# Altium PCB ESP8266TV.PcbDoc
Units mil, origin at the board's own origin, x right, y up, seen from the top; angles counter-clockwise.
Board outline 1875 x 1755 mil, 2 copper layers (Top Layer, Bottom Layer); 48 components, 33 nets, 188 pads, 40 vias.
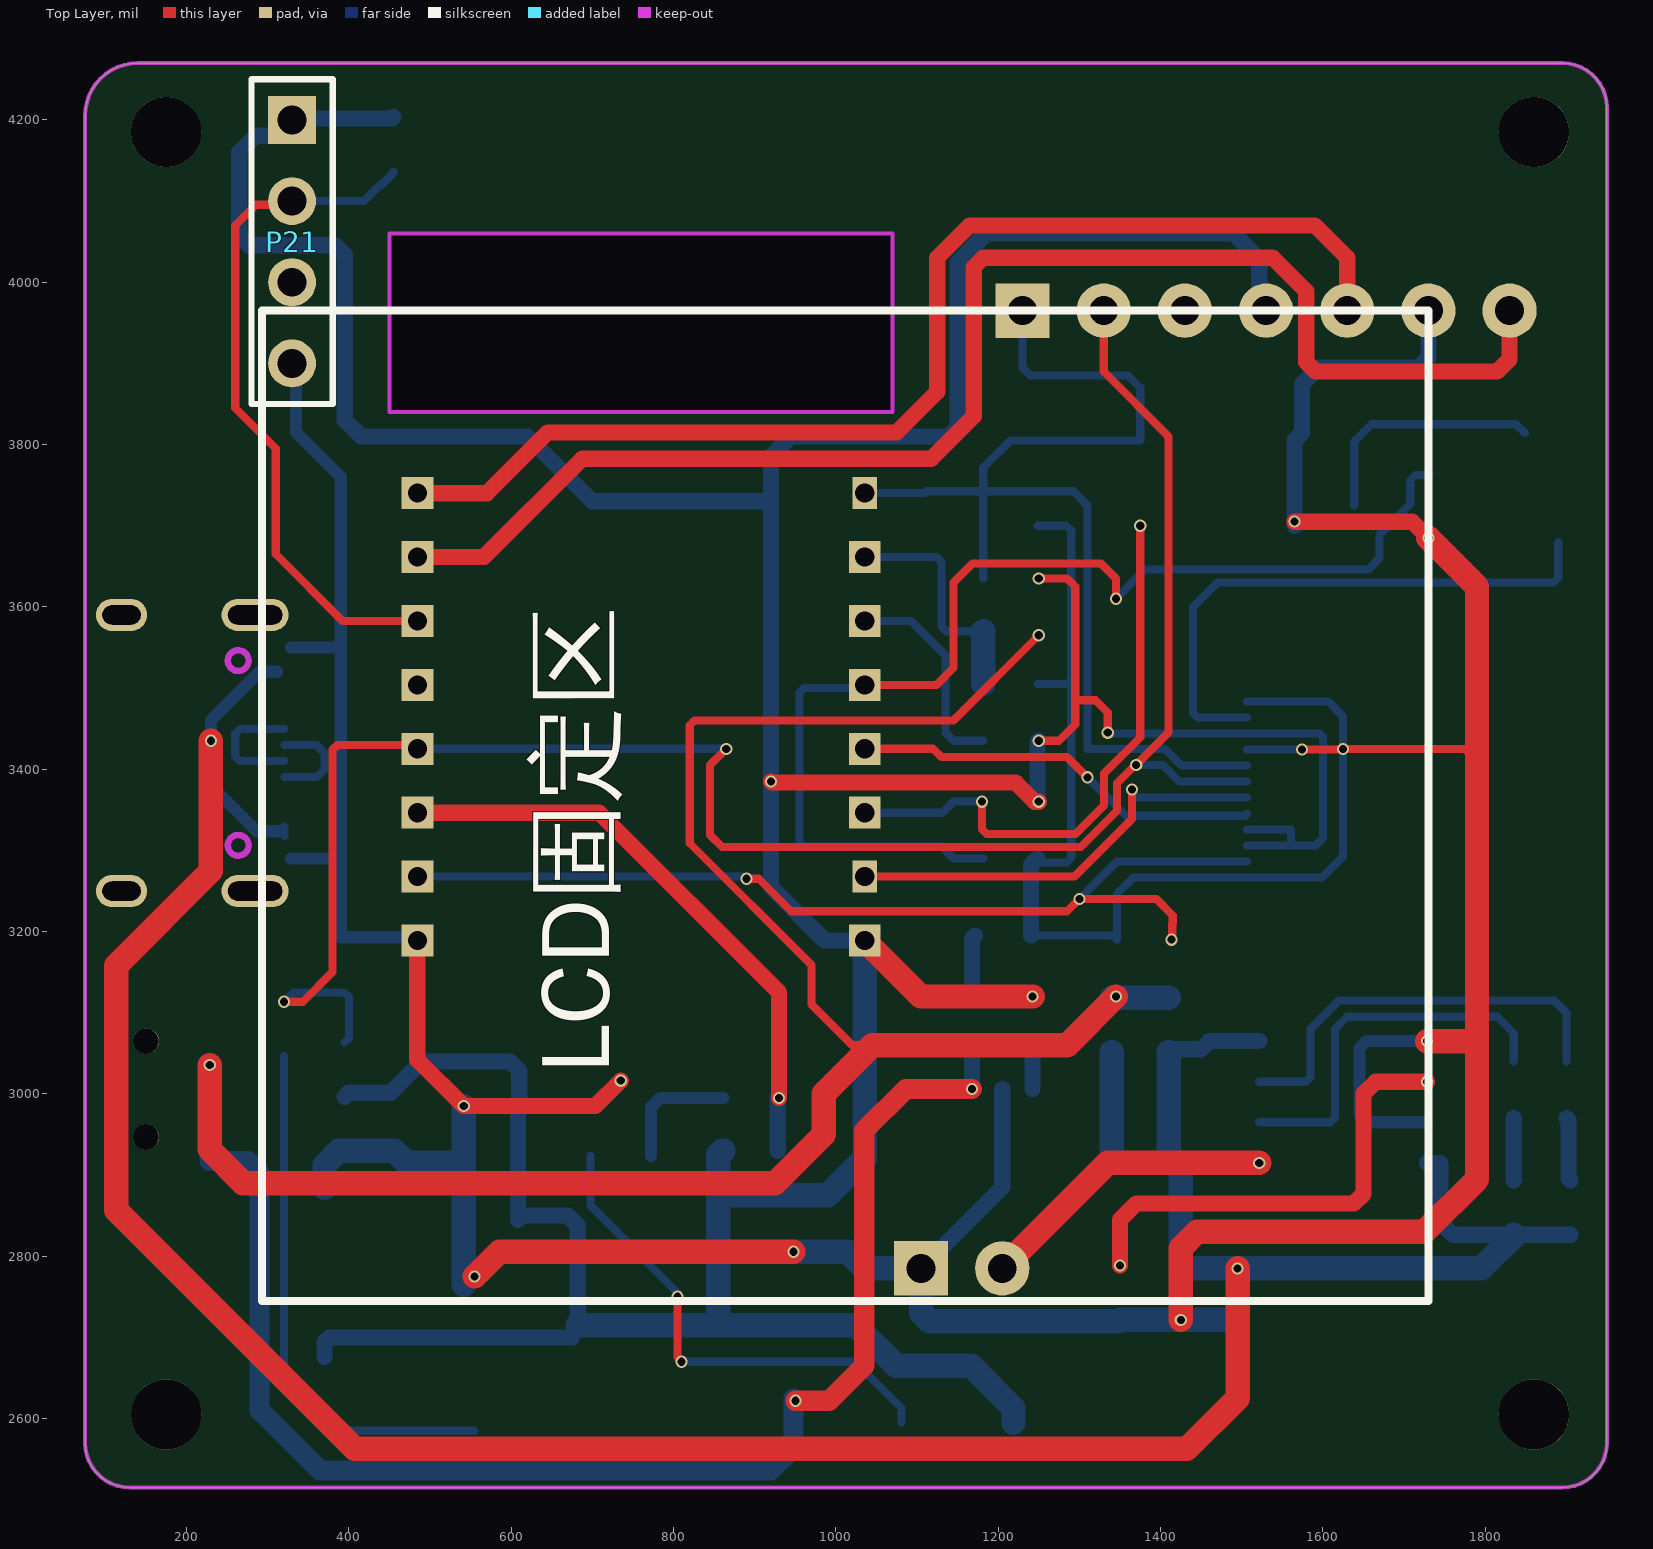
[diagram p0: Top Layer view]
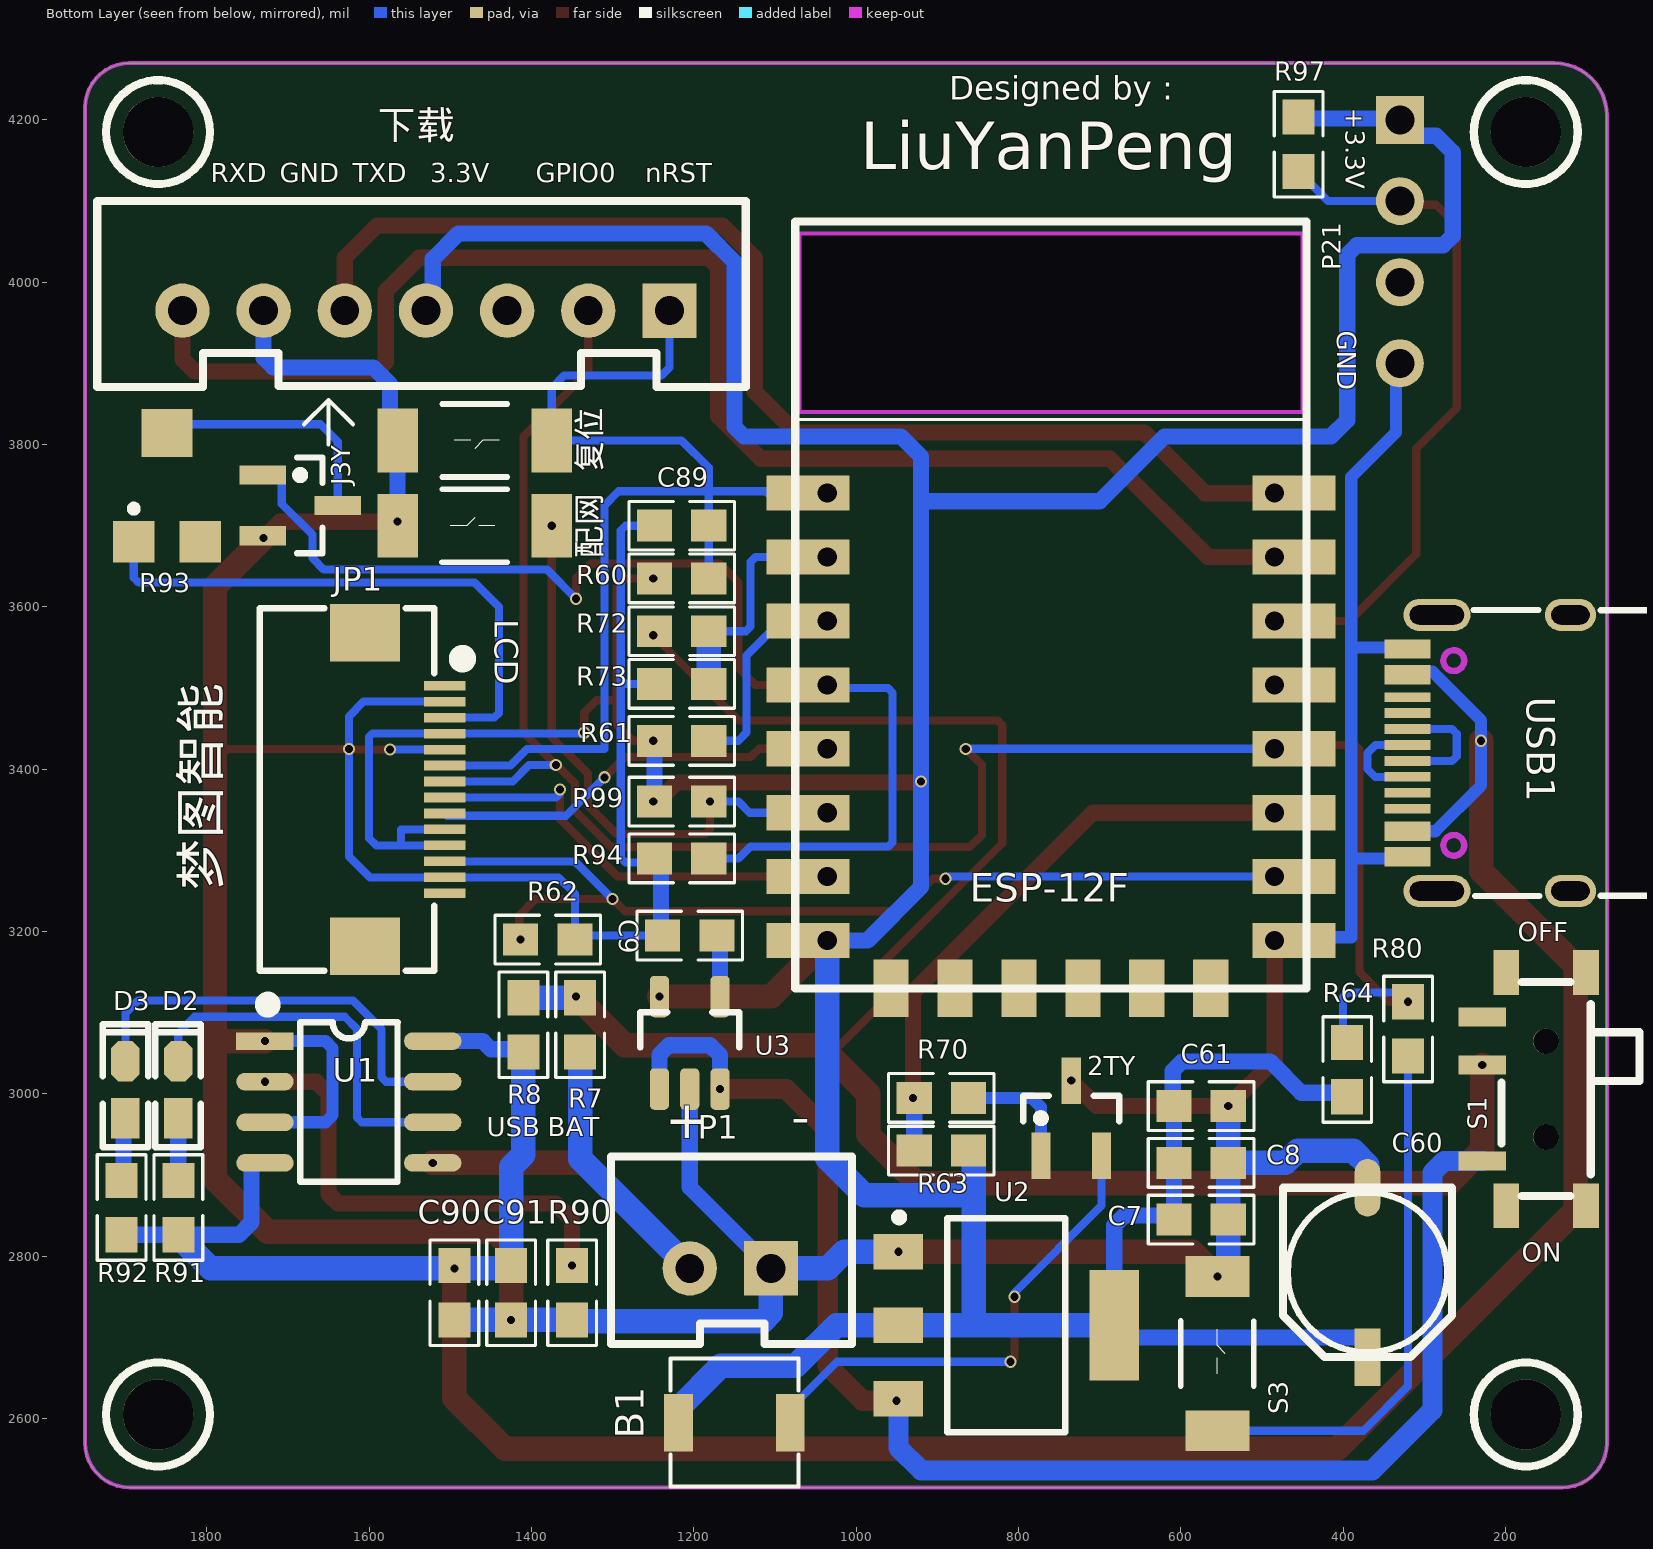
[diagram p1: Bottom Layer view, seen from below]

## Layer stack, top to bottom
Top Solder: solder mask 0.4, Solder Resist, Dk 3.5
Top Layer: signal copper 1.4
Dielectric 1: dielectric 12.6, FR-4, Dk 4.8
Bottom Layer: signal copper 1.4
Bottom Solder: solder mask 0.4, Solder Resist, Dk 3.5

## Board outline
130,2515 cw(c130,2570) 75,2570 75,4205 cw(c140,4205) 140,4270 1895,4270 cw(c1895,4215) 1950,4215 1950,2570 cw(c1895,2570) 1895,2515
cut-out: 450,3840 1070,3840 1070,4060 450,4060

## Design rules (kind name [scope] priority, off if disabled: settings)
Clearance [All] p1: gap=6 ignorepadtopadclearanceinfootprint=TRUE except(0: Arc-Hole Track-Hole SMDPad-Hole THPad-Hole Via-Hole Fill-Hole Poly-Hole Region-Hole Text-Hole)
HoleSize [All] p1: absolutevalues=TRUE maxlimit=200 minlimit=1 maxpercent=80.000 minpercent=20.000
HoleToHoleClearance [All] p1: gap=1 allowstackedmicrovias=TRUE
MinimumSolderMaskSliver [All] p1: minsoldermaskwidth=1
PolygonConnect [All] p1: connectstyle=Relief reliefconductorwidth=10 reliefentries=4 polygonreliefangle="90 Angle" airgapwidth=10
RoutingVias [All] p1: holewidth=28 width=50 viastyle="Through Hole" minholewidth=10 minwidth=10 maxholewidth=200 maxwidth=200
SilkToSilkClearance [All] p1: silktosilkclearance=0
SilkToSolderMaskClearance [IsPad] p1: minsilkscreentomaskgap=0 clearancetoexposedcopper=TRUE
SolderMaskExpansion [All] p1: expansion=4
Width [All] p1: maxlimit=100 minlimit=5 preferedwidth=10 minimp=50.000000 maximp=50.000000 favimp=50.000000
25 further rules are at their usual default settings.

## Classes and differential pairs
component class 蓝牙模块电路: 2TY C7 C8 C9 C60 C61 C89 C90 C91 D2 D3 D5 ESP-12F flash JP1 LCD P1 P21 R7 R8 R60 R61 R62 R63 R64 R70 R72 R73 R80 R90 R91 R92 R93 R94 R97 R99 S1 S3 U1 U2 U3 USB1

## Components (designator, comment, footprint, x,y, rotation, side; value= is the part's Value field where it differs from the comment)
2TY "PNP" 2TY 735,2970 r90 bottom
B1 "DC3V" FM4020 1150,2595 r180 bottom
C7 "0.1uF" 0603-1 575,2845 r0 bottom value=0.1u
C8 "10uF" 0603-1 575,2915 r0 bottom value=0.1u
C9 "10uF" 0603-1 1205,3195 r180 bottom value=0.1u
C60 "10V" "CM C(5*5.4)" 370,2780 r270 bottom value=100uF
C61 "" 0603-1 575,2985 r0 bottom value=0.1uF
C89 "0.1uF" 0603-1 1215,3700 r0 bottom
C90 "" 0603-1 1495,2755 r90 bottom value=10uF
C91 "" 0603-1 1425,2755 r90 bottom value=0.1uF
D2 "" "LED 0603G" 1835,3005 r90 bottom
D3 "" "LED 0603R" 1900,3005 r90 bottom
E1 "固定孔" "M2.2 - 3" 175,4185 r180 bottom
E2 "固定孔" "M2.2 - 3" 1860,4185 r180 bottom
E3 "固定孔" "M2.2 - 3" 1860,2605 r180 bottom
E4 "固定孔" "M2.2 - 3" 175,2605 r180 bottom
ESP-12F "ESP-12E&F Module" "ESP-12E&F Module" 760,3435 r180 bottom
J3Y "J3Y" J3Y 1685,3725 r180 bottom (schematic designator VT1)
JP1 "FPC1.0-14P" "FPC0.5 2H-S-W-14P" 1605,3375 r270 bottom
P1 "VBAT" XH2.54-2P 1105,2785 r0 bottom
P21 "Header 4" HDR1X4 330,4200 r270 top
R7 "0R" 0603-1 1340,3085 r270 bottom
R8 "0R" 0603-1 1410,3085 r270 bottom
R60 "472" 0603-1 1215,3635 r180 bottom
R61 "472" 0603-1 1215,3435 r180 bottom
R62 "472" 0603-1 1380,3190 r0 bottom
R63 "472" 0603-1 895,2930 r0 bottom
R64 "472" 0603-1 395,3030 r90 bottom
R70 "01B" 0603-1 895,2995 r0 bottom value=1K
R72 "472" 0603-1 1215,3570 r0 bottom
R73 "01B" 0603-1 1215,3505 r180 bottom
R80 "01B" 0603-1 320,3080 r90 bottom
R90 "302" 0603-1 1350,2755 r90 bottom value=3K
R91 "01B" 0603-1 1835,2860 r90 bottom value=1K
R92 "01B" 0603-1 1905,2860 r270 bottom value=1K
R93 "" "R 3*3" 2114,3586 r90 bottom value=1K
R94 "01B" 0603-1 1215,3290 r0 bottom
R97 "102" 0603-1 455,4170 r270 bottom
R99 "472" 0603-1 1215,3360 r0 bottom
S1 "SS-12F23" MSK-12C01-07 150,3005.94 r90 bottom
S3 "SW-PB" "SW2 _M" 555,2590 r180 bottom
U1 "TP4056" SOP8_N 1625,2990 r180 bottom
U2 "ASM1117" SOT-223 815,2715 r270 bottom
U3 "LP2992 3V3" SOT23-5 1205,3065 r90 bottom
USB1 "Type-C" USB_TYPE_C_FEMALE_12_16P 120,3420 r90 bottom
下载 "Header 7" XH2.54-7P 1230,3965 r0 bottom (schematic designator P20)
复位 "SW-PB" "SW2 _M" 1560,3805 r270 bottom (schematic designator SW2)
配网 "SW-PB" "SW2 _M" 1380,3700 r90 bottom (schematic designator SW1)

## Footprints (in the part's own frame and the unit in brackets; to place one, negate y for a bottom-side part, rotate by r counter-clockwise, add the part's x,y. Pads: shape width x height; smd on the part's side, far side on the other; paste and mask are expansions set on the pad)
2TY [mm] "SOT23, 3-Leads, Body 2.9x1.3mm, Pitch 0.95mm, Lead Span 2.3mm - Reverse Pinning, IPC Low Density"
  rect 1.45x0.6 smd: 1(-1.175,0.95) 2(-1.175,-0.95) 3(1.175,0)
  silkscreen extent -0.12,-1.5 0.7,1.5, body extent -0.7,-1.5 0.7,1.5, height 1.1
0603-1 [mm] "贴片带丝印"
  rect 1.1x1 smd: 1(-0.85,0) 2(0.85,0)
  silkscreen extent -1.65,-0.76 1.65,0.76, body extent -1.14,-0.38 1.14,0.38, height 1
"CM C(5*5.4)" [mm] "贴片电解电容，直径5mm，高5.4mm"
  rect 1.8x0.8 smd: 1(2.65,0)
  oval 1.8x0.8 smd: 2(-2.65,0)
  silkscreen extent -2.65,-2.65 2.65,2.65, body extent -2.95,-2.65 2.95,2.65, height 5.4
"ESP-12E&F Module" [mm]
  rect 2.6x1.1 smd: 1(-7.6,7.75) 2(-7.6,5.75) 3(-7.6,3.75) 4(-7.6,1.75) 5(-7.6,-0.25) 6(-7.6,-2.25) 7(-7.6,-4.25) 8(-7.6,-6.25) 15(7.6,-6.25) 16(7.6,-4.25) 17(7.6,-2.25) 18(7.6,-0.25) 19(7.6,1.75) 20(7.6,3.75) 21(7.6,5.75) 22(7.6,7.75)
  rect 0.762x1 hole 0.6: 1(-7,7.75) 7(-7,-4.25)
  rect 0.762x1 / inner rect 0.762x1 / far side rect 1x1 hole 0.6: 2(-7,5.75) 3(-7,3.75) 4(-7,1.75) 5(-7,-0.25) 6(-7,-2.25) 8(-7,-6.25) 15(7,-6.25) 16(7,-4.25) 17(7,-2.25) 18(7,-0.25) 19(7,1.75) 20(7,3.75) 21(7,5.75) 22(7,7.75)
  rect 1.1x1.8 smd: 9(-5,-7.75) 10(-3,-7.75) 11(-1,-7.75) 12(1,-7.75) 13(3,-7.75) 14(5,-7.75)
  silkscreen extent -8,-7.75 8,16.25
FM4020 [mm] "小型蜂鸣器"
  rect 0.9x1.8 smd: 1(-1.75,0) 2(1.75,0)
  silkscreen extent -2,-2 2,2
"FPC0.5 2H-S-W-14P" [mm] "长：11.2mm，宽：5.2mm，高：2mm"
  rect 1.8x2.2 smd: 0(-4.9,0) 0(4.9,0)
  rect 0.3x1.3 smd: 1(-3.25,2.497) 2(-2.75,2.497) 3(-2.25,2.497) 4(-1.75,2.497) 5(-1.25,2.497) 6(-0.75,2.497) 7(-0.25,2.497) 8(0.25,2.497) 9(0.75,2.497) 10(1.25,2.497) 11(1.75,2.497) 12(2.25,2.497) 13(2.75,2.497) 14(3.25,2.497)
  silkscreen extent -5.68,-3.3 5.68,3.23, body extent -5.6,-3.15 5.6,2.85, height 2
HDR1X4 [mm] "Connector; Header; 4 Position"
  rect 1.5x1.5 hole 0.9: 1(0,0)
  round 1.5 hole 0.9: 2(2.54,0) 3(5.08,0) 4(7.62,0)
  silkscreen extent -1.27,-1.27 8.89,1.27
J3Y [mm] "SOT23, 3-Leads, Body 2.9x1.3mm, Pitch 0.95mm, Lead Span 2.3mm - Reverse Pinning, IPC Low Density"
  rect 1.45x0.6 smd: 1(-1.175,0.95) 2(-1.175,-0.95) 3(1.175,0)
  silkscreen extent -0.13,-1.5 0.7,1.5, body extent -0.7,-1.5 0.7,1.5, height 1.1
"LED 0603G" [mil] "绿色0603LED"
  rect 50x35 smd: 1(-35,0.26)
  oct 50x35 smd: 2(35,0.26)
  silkscreen extent -71,-28 81,28, body extent -31,-16 31,16, height 24
"LED 0603R" [mil] "红色0603LED"
  rect 50x35 smd: 1(-35,0.26)
  oct 50x35 smd: 2(35,0.26)
  silkscreen extent -71,-28 81,28, body extent -31,-16 31,16, height 24
"M2.2 - 3" [mm] "固定孔"
  round 2.2 hole 2.2: 1(0,0)
  silkscreen extent -1.63,-1.62 1.63,1.62
MSK-12C01-07 [mm] "6.7*2.8*1.5mm(长宽高）"
  rect 1.4x0.8 smd: 0(-3.65,-1.25) 0(-3.65,1.25) 0(3.65,-1.25) 0(3.65,1.25)
  rect 0.6x1.5 smd: 1(-2.25,1.996) 2(0.75,1.996) 3(2.25,1.996)
  round 0.8 hole 0.8: " "(-1.5,0) " "(1.5,0)
  silkscreen extent -3.35,-2.92 3.35,1.4, body extent -3.92,-2.9 3.92,2.4, height 1.5
"R 3*3" [mil] "3*3可调贴片电阻"
  rect 51.18x51.18 smd: 1(94,-224) 2(94,-306)
  rect 59.06x62.99 smd: 3(228,-265)
  silkscreen extent 131,-228 139,-220
SOP8_N [mm] "5*6*1.8mm（长宽高）"
  rect 1.8x0.55 smd: 1(-2.625,1.905)
  oval 1.8x0.55 smd: 2(-2.625,0.635) 3(-2.625,-0.635) 4(-2.625,-1.905) 5(2.625,-1.905) 6(2.625,-0.635) 7(2.625,0.635) 8(2.625,1.905)
  silkscreen extent -2.69,-2.5 1.52,3.2, body extent -3,-2.5 3,2.5, height 1.9
SOT23-5 [mm] "SOT23, 3-Leads, Body 3.1x3.0mm (max), Pitch 0.95mm, IPC Medium Density"
  rrect50% 1.3x0.6 smd: 1(-1.5,0.95) 2(-1.5,0) 3(-1.5,-0.95) 4(1.396,-0.95) 5(1.396,0.95)
  silkscreen extent -0.2,-1.55 0.9,1.55, body extent -1.48,-1.45 1.32,1.45, height 1.2
SOT-223 [mm]
  rect 1.1x1.55 smd: 1(-2.3,-3.375) 2(0,-3.375) 3(2.3,-3.375)
  rect 3.45x1.55 smd: 4(0,3.375)
  silkscreen extent -3.5,-3.48 3.35,1.85, body extent -3.3,-3.94 3.3,3.43, height 0.8
"SW2 _M" [mil] "3*4*2"
  rect 78.74x50 smd: 1(0,185) 2(0,-5)
  silkscreen extent -45,50 45,130, body extent -45,48 45,133, height 31
USB_TYPE_C_FEMALE_12_16P [mm]
  oval 1x1.6 hole 0.6 slot 1.2 at 90 deg: 0(-4.32,0) 0(4.32,0)
  oval 1x2.1 hole 0.6 slot 1.7 at 90 deg: 0(-4.32,4.18) 0(4.32,4.18)
  rect 0.3x1.45 smd: A1(-3.4,5.1) A4(-2.6,5.1) A5(-1.25,5.1) A6(-0.25,5.1) A7(0.25,5.1) A8(1.25,5.1) A9(2.6,5.1) A12(3.4,5.1) B1(3.1,5.1) B4(2.3,5.1) B5(1.75,5.1) B6(0.75,5.1) B7(-0.75,5.1) B8(-1.75,5.1) B9(-2.3,5.1) B12(-3.1,5.1)
  Keep-Out Layer circle w0.2: c2.89,3.65 r0.325
  Keep-Out Layer circle w0.2: c-2.89,3.65 r0.325
  silkscreen extent -4.47,-2.6 4.47,3.03, body extent -4.47,-2.63 4.43,4.67, height 3.4
XH2.54-2P [mm] "接插件，2P"
  rect 1.7x1.7 hole 0.9: 1(0,0)
  round 1.7 hole 0.9: 2(2.54,0)
  silkscreen extent -2.54,-3.51 5.01,2.37, body extent -2.5,-3.3 5.04,2.4, height 7.05
XH2.54-7P [mm] "接插件，7P"
  rect 1.7x1.7 hole 0.9: 1(0,0)
  round 1.7 hole 0.9: 2(2.54,0) 3(5.08,0) 4(7.62,0) 5(10.16,0) 6(12.7,0) 7(15.24,0)
  silkscreen extent -2.39,-3.43 17.91,2.39, body extent -2.5,-3.3 17.74,2.4, height 7.05

## Part data
2TY: "PNP Bipolar Transistor", LatestRevisionDate=29-May-2009, LatestRevisionNote="IPC-7351 Footprint Added.", PackageDescription="3-Pin SOT-23 Package 0.95 mm Pitch, 2.4 mm Lead Span", PackageReference=SOT-23B, PackageVersion=Aug-1999, Published=8-Jun-2000, Publisher="Altium Limited"
B1: library part BEEP, "蜂鸣器"
C7: library part 电容-0402, "Capacitor"
C8 C9: library part 电容-0603, "Capacitor"
C60: library part "Cap Pol3", "Polarized Capacitor (Surface Mount)", LatestRevisionDate=29-May-2009, LatestRevisionNote="IPC-7351 Footprint Added.", PackageDescription="Chip Capacitor", PackageReference=C0805, Published=8-Jun-2000, Publisher="Altium Limited"
C61 C90 C91: library part Cap, "Capacitor", LatestRevisionDate=17-Jul-2002, LatestRevisionNote="Re-released for DXP Platform.", PackageDescription="Radial Cap, Thru-Hole; 2 Leads; 0.3 in Pin Spacing", PackageReference=RAD-0.3, Published=8-Jun-2000, Publisher="Altium Limited"
C89: library part SMT_C_0402, "Surface mount capacitor 0402"
D2 D3: library part LED0, "Typical INFRARED GaAs LED", LatestRevisionDate=08-Jul-2005, LatestRevisionNote="Mech Layer 1 removed.", PackageDescription="LED; 2 Leads", PackageReference=LED-0, Published=8-Jun-2000, Publisher="Altium Limited"
E1 E2 E3 E4: library part Antenna, "Generic Antenna", LatestRevisionDate=17-Jul-2002, LatestRevisionNote="Re-released for DXP Platform.", PackageReference=PIN1, Published=24-Mar-1999, Publisher="Altium Limited"
J3Y: library part SMT_TRIODE_NPN, "Surface mount NPN transistor, package SOT-23"
JP1: library part FPC-14P, "FPC连接器"
P1: library part "Header 2", "Header, 2-Pin", LatestRevisionDate=17-Jul-2002, LatestRevisionNote="Re-released for DXP Platform.", Publisher="Altium Limited"
P21: "Header, 4-Pin", LatestRevisionDate=17-Jul-2002, LatestRevisionNote="Re-released for DXP Platform.", Publisher="Altium Limited"
R7 R8 R60 R61 R62 R63 R64 R80 R99: library part SMT_R_0402, "Surface mount resistor 0402"
R70 R72 R73 R90 R91 R92 R94 R97: library part Res2, "Resistor", LatestRevisionDate=17-Jul-2002, LatestRevisionNote="Re-released for DXP Platform.", PackageDescription="Axial Device, Thru-Hole; 2 Leads; 0.4 in Pin Spacing", PackageReference=AXIAL-0.4, Published=8-Jun-2000, Publisher="Altium Limited"
R93: library part "Res Tap", "Tapped Resistor", LatestRevisionDate=17-Jul-2002, LatestRevisionNote="Re-released for DXP Platform.", PackageDescription="Variable Resistor, Thru-Hole; 3 Leads", PackageReference=VR3, Published=24-Mar-1999, Publisher="Altium Limited", Set Position=0.5, Sim Note="Enter the Resistance value and the set point into parameter fields."
S1: library part SSW-1P, "1路波动开关"
S3 复位 配网: "微动开关", LatestRevisionDate=17-Jul-2002, LatestRevisionNote="Re-released for DXP Platform.", PackageReference=SPST-2, Published=24-Mar-1999, Publisher="Altium Limited"
U2: "3.3V稳压芯片"
U3: library part LP2992, "LDO"
USB1: library part USB-Type-C-TOP
下载: "Header, 7-Pin", LatestRevisionDate=17-Jul-2002, LatestRevisionNote="Re-released for DXP Platform.", Publisher="Altium Limited"

## Via types
v1: diameter 15, hole 10, Top Layer to Bottom Layer, 40 vias

## Nets (pads, with @x,y where several pads share a name; then routed paths per layer and width w, separated by ;. In a path a pad name is that pad's centre, name@x,y a point inside that pad or via, vN(x,y) a via of type N, cw(c..) or ccw(c..) an arc to the next point about the centre after c; other vN are vias at no path point)
+3.3V: B1.1 C7.2 C8.2 C60.1 C61.2 ESP-12F.8 JP1.4 JP1.10 JP1.11 P21.1 R60.1 R61.1 R63.1 R64.1 R97.1 R99.2 U2.2 U2.4 U3.5 下载.4 | length 6594.8
  Top Layer w10: v1(1250,3435) 1275,3435 1295,3455 1295,3485 ; v1(1250,3635) 1285,3635 1295,3625 1295,3485 ; v1(1335,3445) 1335,3470 1320,3485 1295,3485
  Top Layer w20: v1(920,3385) 921.5,3383.5 1221.5,3383.5 1245,3360 v1(1250,3360)
  Top Layer w30: ESP-12F.8@1035.59,3188.94 1104.58,3119.94 v1(1242.4,3119.94)
  Bottom Layer w10: v1@1335,3443.9 JP1.4 1596.1,3443.9 1600,3440 1600,3315 1591.1,3306.1 1560,3306.1 ; JP1.11 1560,3306.1 ; JP1.10 1560.79,3325.79 1560.79,3306.89 1560,3306.1
  Bottom Layer w20: C60.1 370,2694.25 375.75,2700 U2.4@675,2700 ; R64.1 400,3001.53 451.53,3001.53 490,3040 598.28,3040 610,3028.28 610,2986.54 C61.2 C8.2 C7.2 613.46,2850 670,2850 682.13,2837.87 U2.4 ; R97.1 453.27,4201.73 331.73,4201.73 P21.1 310.47,4180.47 285.47,4180.47 265,4160 265,4057.24 276.72,4045.53 383.28,4045.53 395,4033.81 395,3830 415,3810 620,3810 700,3730 920,3730 ; ESP-12F.8@1035.59,3188.94 986.06,3188.94 920,3255 v1(920,3385) 920,3730 ; R99.2 1248.46,3433.46 v1(1250,3435) ; 下载.4 1521.54,3973.46 1521.54,4028.46 1490,4060 1185,4060 1150,4025 1150,3821.72 1138.28,3810 945,3810 920,3785 920,3730
  Bottom Layer w30: U2.4 850,2715 ; R63.1 860,2930 855.31,2925.31 855.31,2875 ; ESP-12F.8@1035.59,3188.94 1035.59,2920.59 990,2875 855.31,2875 ; B1.1 1218.9,2612.72 1166.61,2665 1074.19,2665 1024.19,2715 U2.2 855.31,2715 855.31,2875
EN: ESP-12F.3 R61.2 | length 262.7
  Bottom Layer w10: ESP-12F.3@1035.59,3582.64 1059.21,3582.64 1092.36,3582.64 1135,3540 1135,3445 1145,3435 R61.2
GND: 2TY.3 C7.1 C8.1 C9.1 C60.2 C61.1 C89.2 C90.1 C91.1 ESP-12F.15 J3Y.2 JP1.2 JP1.5 JP1.13 P1.1 P21.4 R62.1 R73.1 R90.1 R94.2 S3.1 U1.1 U1.3 U2.1 U3.2 USB1.A1 USB1.A12 USB1.B1 USB1.B12 下载.6 复位.2 配网.1 | length 6989.3
  Top Layer w10: v1(1574.21,3424.21) 1624.21,3424.21 v1(1625,3425) 1775,3425 1790,3410
  Top Layer w20: ESP-12F.15@484.41,3188.94 484.41,3042.12 v1(541.53,2985) 703.74,2985 v1(735,3016.26) ; v1(1565,3705) 1710,3705 v1(1730,3685)
  Top Layer w30: v1(555,2775) 585.55,2805.55 v1(947.87,2805.55) ; v1(1425,2721.53) 1425,2810 1445,2830 1725,2830 1790,2895 1790,3065 ; v1(1728.35,3065) 1790,3065 ; v1(1730,3685) 1790,3625 1790,3410 1790,3065
  Bottom Layer w10: C9.1 1240.43,3195 1341.53,3195 R62.1 1346.53,3246.53 1366.73,3266.73 JP1.13 1599.14,3266.73 1625,3292.59 v1(1625,3425) 1625,3465 1606.73,3483.27 JP1.2 ; R94.2 1253.46,3285 1284.14,3285 1290,3290.86 1290,3510.86 ; R73.1 1284.14,3505 1290,3510.86 ; C89.2 1284.14,3700 1290,3694.14 1290,3510.86 ; JP1.5 v1(1574.21,3424.21)
  Bottom Layer w15: USB1.A1@328.74,3290 390,3290 ; USB1.A12@328.74,3550 390,3550 ; P21.4 335,3895 335,3815 390,3760 390,3550 ; ESP-12F.15@484.41,3188.94 480.47,3192.88 390,3192.88 390,3290 ; U1.3 1653.79,2965 1645,2973.79 1645,3056.21 1653.79,3065 v1(1728.35,3065) ; 390,3290 390,3550
  Bottom Layer w20: P1.1 1205,2885 U3.2 ; C9.1@1240.43,3195 1240.43,3281.97 R94.2 ; 配网.1 v1(1565,3705) 复位.2 1574.37,3814.37 1574.37,3874.37 1595,3895 1718.28,3895 1730,3906.72 下载.6
  Bottom Layer w30: C60.2 370,2912.43 387.57,2930 456.07,2930 471.07,2915 C8.1 ; S3.1@541.53,2765 C7.1 C8.1 ; v1(541.53,2985) C8.1 ; v1(947.87,2805.55) 1014.45,2805.55 1035,2785 P1.1 1105,2730 1115,2720 1348.47,2720 R90.1 v1(1425,2721.53) C90.1
GPIO0: ESP-12F.18 JP1.7 R64.2 R80.2 下载.2 | length 2445.4
  Top Layer w10: v1(320,3113.46) 343.46,3113.46 380,3150 380,3424.14 385.86,3430 479.57,3430 ESP-12F.18@484.41,3425.16 ; v1(865,3425) 845,3405 845,3319.14 860,3304.14 1301.77,3304.14 1346.5,3348.87 1346.5,3382.66 1368.84,3405 v1(1370,3405) 1410,3445 1410,3810 1330,3890 下载.2
  Bottom Layer w10: v1(320,3113.46) 331.54,3125 394.14,3125 400,3119.14 400,3068.46 R64.2 ; ESP-12F.18@484.41,3425.16 864.84,3425.16 v1(865,3425) ; v1(1370,3405) 1402.97,3405 1423.13,3384.84 JP1.7
GPIO2: ESP-12F.17 R63.2 R70.2 | length 732.3
  Top Layer w20: ESP-12F.17@484.41,3346.42 708.58,3346.42 930,3125 v1(930,2995)
  Bottom Layer w20: R63.2 R70.2
GPIO4: ESP-12F.19
GPIO5: ESP-12F.20 P21.2 R97.2 | length 857.9
  Top Layer w10: P21.2 325.47,4095.47 285.47,4095.47 260,4070 260,3845 310,3795 310,3665 392.36,3582.64 ESP-12F.20@484.41,3582.64
  Bottom Layer w10: P21.2 418.46,4100 438.35,4119.88 440.31,4119.88 455,4134.57 R97.2
GPIO13: ESP-12F.7 JP1.8 | length 538.7
  Top Layer w10: ESP-12F.7@1035.59,3267.68 1293.84,3267.68 1365,3338.84 v1(1365,3375)
  Bottom Layer w10: v1@1365,3370 1369.84,3365.16 JP1.8
GPIO14: ESP-12F.5 JP1.9 | length 530
  Top Layer w10: ESP-12F.5@1035.59,3425.16 1119.84,3425.16 1130,3415 1285,3415 v1(1310,3390)
  Bottom Layer w10: ESP-12F.5@1035.59,3425.16 ESP-12F.5@1059.21,3425.16 ; v1(1310,3390) 1357.31,3342.69 1503.92,3342.69 JP1.9
GPIO15: ESP-12F.16 JP1.12 R62.2 | length 1219.3
  Top Layer w10: v1(890,3265) 905,3265 945,3225 1285,3225 v1(1300,3240) 1395,3240 1415,3220 1415,3210 1414.42,3209.42 1414.42,3190.96 v1(1413.46,3190)
  Bottom Layer w10: ESP-12F.16@484.41,3267.68 887.32,3267.68 v1(890,3265) ; v1(1300,3240) 1346.42,3286.42 JP1.12
GPIO16: ESP-12F.4 J3Y.1 R94.1 | length 1452.4
  Top Layer w10: ESP-12F.4@1035.59,3503.9 1123.9,3503.9 1145,3525 1145,3630 1168.5,3653.5 1326.5,3653.5 1345,3635 v1(1345,3610)
  Bottom Layer w10: ESP-12F.4@1035.59,3503.9 1031.69,3500 960.86,3500 955,3494.14 955,3310 960,3305 1130,3305 1145,3290 R94.1 ; v1(1345,3610) 1381,3646 1656,3646 1670,3660 1670,3688.94 1707.72,3726.65 1707.72,3755.59 1714.53,3762.4 J3Y.1
Net2TY_1: 2TY.1 R70.1 | length 153.7
  Bottom Layer w15: 2TY.1 772.4,2983.62 783.79,2995 R70.1
Net2TY_2: 2TY.2 B1.2 | length 612.8
  Top Layer w10: v1(805,2750) 805,2675 v1(810,2670)
  Bottom Layer w10: 2TY.2 697.6,2862.4 805,2755 v1(805,2750) ; v1(810,2670) 1023.82,2670 1081.1,2612.72 B1.2
NetC9_2: C9.2 U3.4 | length 76.7
  Bottom Layer w20: U3.4 1167.6,3191.06 C9.2
NetD2_1: D2.1 R91.2 | length 76.6
  Bottom Layer w20: R91.2 1835.13,2893.59 1835.13,2969.88 D2.1
NetD2_2: D2.2 U1.6 | length 474.5
  Bottom Layer w10: U1.6 1609.14,2965 1615,2970.86 1615,3080 1630,3095 1815,3095 1835.26,3074.74 D2.2
NetD3_1: D3.1 R92.1 | length 78.5
  Bottom Layer w20: D3.1 1902.63,2967.63 1902.63,2895.84 R92.1
NetD3_2: D3.2 U1.7 | length 520.7
  Bottom Layer w10: U1.7 1579.14,3015 1585,3020.86 1585,3080 1620,3115 1885,3115 1900.26,3099.74 D3.2
NetESP-12F_2: ESP-12F.2 R72.1 R73.2 | length 295.5
  Bottom Layer w10: ESP-12F.2@1035.59,3661.38 1059.21,3661.38 1124.14,3661.38 1130,3655.52 1130,3575.86 1135.86,3570 R72.1
  Bottom Layer w30: R73.2 R72.1
NetESP-12F_6: ESP-12F.6 R99.1 配网.2 | length 716.1
  Top Layer w10: v1(1180,3360) 1180,3326 1185.86,3320.14 1295.14,3320.14 1330.5,3355.5 1330.5,3394.64 1375,3439.14 v1(1375,3700)
  Bottom Layer w10: ESP-12F.6@1035.59,3346.42 1059.21,3346.42 1131.42,3346.42 1145,3360 v1(1180,3360) R99.1
NetJP1_3: JP1.3 R93.1 | length 708.7
  Bottom Layer w10: JP1.3 1445.86,3463.58 1440,3469.44 1440,3600 1470,3630 1884.14,3630 1890,3635.86 R93.1
NetR80_1: R80.1 S3.2 | length 664.3
  Bottom Layer w10: R80.1 320,2640 375,2585 S3.2
NetR90_2: R90.2 U1.2 | length 577.5
  Top Layer w20: v1(1350,2788.46) 1350,2845 1370,2865 1638.28,2865 1650,2876.72 1650,3000 1665,3015 v1(1728.35,3015)
NetR93_3: J3Y.3 R93.3 | length 302.4
  Bottom Layer w10: J3Y.3 1638.74,3803.74 1660,3825 1838,3825 R93.3
NetS1_1: S1.1 U2.3 U3.1 U3.3 | length 1839.3
  Top Layer w25: v1(950.36,2621.97) 991.97,2621.97 1035,2665 1035,2955 1085.94,3005.94 v1(1167.6,3005.94)
  Bottom Layer w20: v1(1167.6,3005.94) 1167.6,3047.6 1180,3060 1230.69,3060 1242.4,3048.28 U3.1
  Bottom Layer w25: S1.1 275.36,2917.36 290,2902.72 290,2610 364,2536 920,2536 947.87,2563.87 U2.3 v1(950.36,2621.97)
nRST: C89.1 ESP-12F.1 JP1.6 R60.2 下载.1 复位.1 | length 1421.9
  Bottom Layer w10: ESP-12F.1@1035.59,3740.12 1059.21,3740.12 1109.5,3740.12 1111.77,3742.39 1181.53,3742.39 ; R60.2 C89.1 1181.53,3742.39 ; 下载.1 1230,3895 1240,3885 1360,3885 1375,3870 复位.1 1215,3805 1181.53,3771.53 1181.53,3742.39 ; JP1.6 1426.07,3404.53 1405.6,3425 1310,3425 1310,3725 1292.61,3742.39 1181.53,3742.39
RXD: ESP-12F.21 下载.7 | length 1780.9
  Top Layer w20: ESP-12F.21@484.41,3661.38 566.38,3661.38 687.5,3782.5 1117.5,3782.5 1170,3835 1170,4018.28 1181.72,4030 1538.28,4030 1579.46,3988.82 1579.46,3901.72 1591.18,3890 1815,3890 1830,3905 下载.7
TXD: ESP-12F.22 下载.5 | length 1460.5
  Top Layer w20: ESP-12F.22@484.41,3740.12 570.12,3740.12 645,3815 1075,3815 1125,3865 1125,4030 1165,4070 1590,4070 1630,4030 下载.5
USB-PWR-DM: USB1.A7 USB1.B7 | length 126.4
  Bottom Layer w10: USB1.B7 360.47,3390.47 370,3400 370,3420 360.16,3429.84 USB1.A7
USB-PWR-DP: USB1.A6 USB1.B6 | length 154.3
  Bottom Layer w10: USB1.A6 320.63,3410 265.86,3410 260,3415.86 260,3443.67 265.86,3449.53 USB1.B6
VBAT: P1.2 R7.2 U1.5 | length 693
  Top Layer w30: P1.2 1335,2915 1515,2915 v1(1521.65,2915)
  Bottom Layer w30: P1.2 1340,2920 R7.2
VCC: R7.1 R8.1 R72.2 S1.2 | length 2410.1
  Top Layer w10: 1045,3060 1020,3060 970,3110 970,3158.84 820,3308.84 820,3454.14 825.86,3460 1145,3460 v1(1250,3565)
  Top Layer w30: v1(228.58,3035.47) 228.58,2931.42 270,2890 925,2890 985,2950 985,3000 1045,3060 1285,3060 v1(1345,3120)
  Bottom Layer w30: R7.1 R8.1
VUSB: C90.2 C91.2 R8.2 R91.1 R92.2 U1.4 U1.8 USB1.A4 USB1.A9 USB1.B4 USB1.B9 | length 3694.4
  Top Layer w30: v1(230,3435) 230,3274.55 113.25,3157.8 113.25,2856.75 407.43,2562.57 1432.57,2562.57 1495,2625 v1(1495,2785)
  Bottom Layer w10: USB1.A4 USB1.B9
  Bottom Layer w15: USB1.A9@311.34,3520 290,3520 230,3460 v1(230,3435) 230,3380 286.46,3323.54 314.88,3323.54
  Bottom Layer w20: R8.2 1413.46,3055 1450,3055 1460,3065 U1.8 ; U1.4 1744.24,2915 1745,2914.24 1745,2841.72 1760.18,2826.53 R91.1 R92.2
  Bottom Layer w30: R8.2 1410,2925.16 1425,2910.16 C91.2 1428.46,2785 v1(1495,2785) 1795.43,2785 1835,2824.57 R91.1
pads on no net: "S1. " E1.1 E2.1 E3.1 E4.1 ESP-12F.9 ESP-12F.10 ESP-12F.11 ESP-12F.12 ESP-12F.13 ESP-12F.14 JP1.0 JP1.1 JP1.14 P21.3 R93.2 S1.0 S1.3 USB1.0 USB1.A5 USB1.A8 USB1.B5 USB1.B8 下载.3

## Keep-outs
Keep-Out Layer:
  lines w5: 75,2570 ccw(c130,2570) 130,2515 1895,2515 ccw(c1895,2570) 1950,2570 1950,2665 1950,4215 ccw(c1895,4215) 1895,4270 140,4270 ccw(c140,4205) 75,4205 75,2570 ; 450,3840 1070,3840 1070,4060 450,4060 450,3840

## Silkscreen, mask and mechanical layers (free items; w line width, h text height)
Top Overlay:
  lines w10: 292.99,2745 292.99,3965 1730,3965 1730,2745 1535,2745 292.99,2745
  text "LCD固定区" at 750,3025 h150 r90
Bottom Overlay:
  lines w5: 1620,3825 1650,3855 ; 1650,3800 1650,3855 ; 1680,3825 1650,3855
  text "+3.3V" at 405,4215 h40 r90
  text "Designed by :" at 885,4215 h50
  text "LiuYanPeng" at 995,4120 h100
  text "nRST" at 1260,4115 h40
  text "GPIO0" at 1395,4115 h40
  text "3.3V" at 1525,4115 h40
  text "TXD" at 1620,4115 h40
  text "GND" at 1710,4115 h40
  text "RXD" at 1795,4115 h40
  text "GND" at 415,3940 h40 r90
  text "LCD" at 1455,3585 h50 r90
  text "梦图智能" at 1770,3250 h80 r270
  text "OFF" at 185,3180 h40
  text "BAT" at 1380,2940 h40
  text "USB" at 1455,2940 h40
  text "-" at 1080,2935 h80
  text "+" at 1235,2930 h80
  text "ON" at 180,2785 h40